# Altium PCB CH552DAPLINK.PcbDoc
Units mil, origin at the board's own origin, x right, y up, seen from the top; angles counter-clockwise.
Board outline 861 x 530 mil, 2 copper layers (Top Layer, Bottom Layer); 25 components, 30 nets, 102 pads, 19 vias.
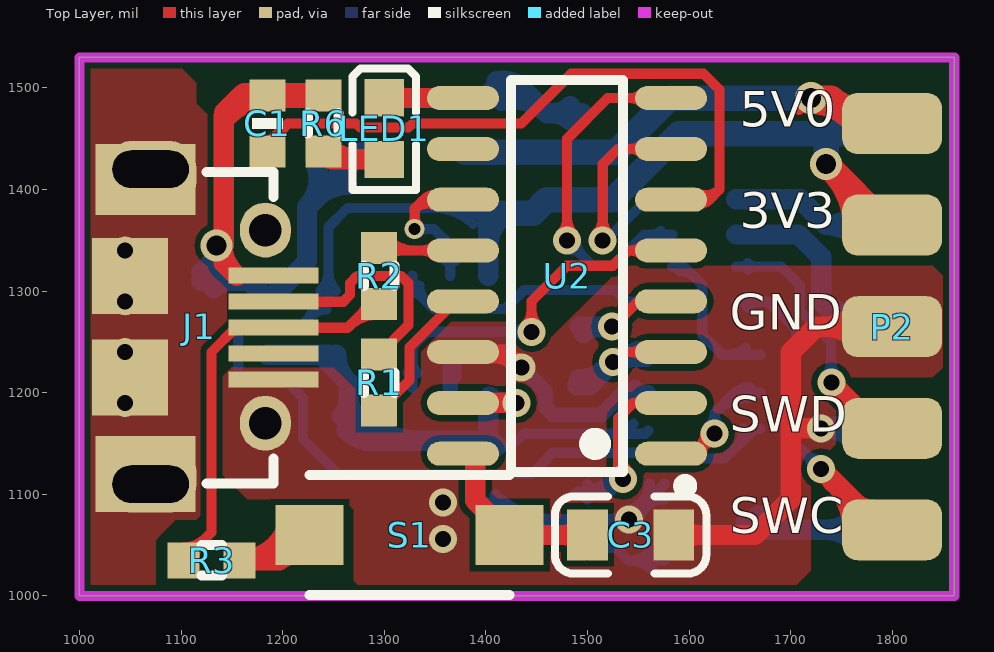
[diagram p0: Top Layer view]
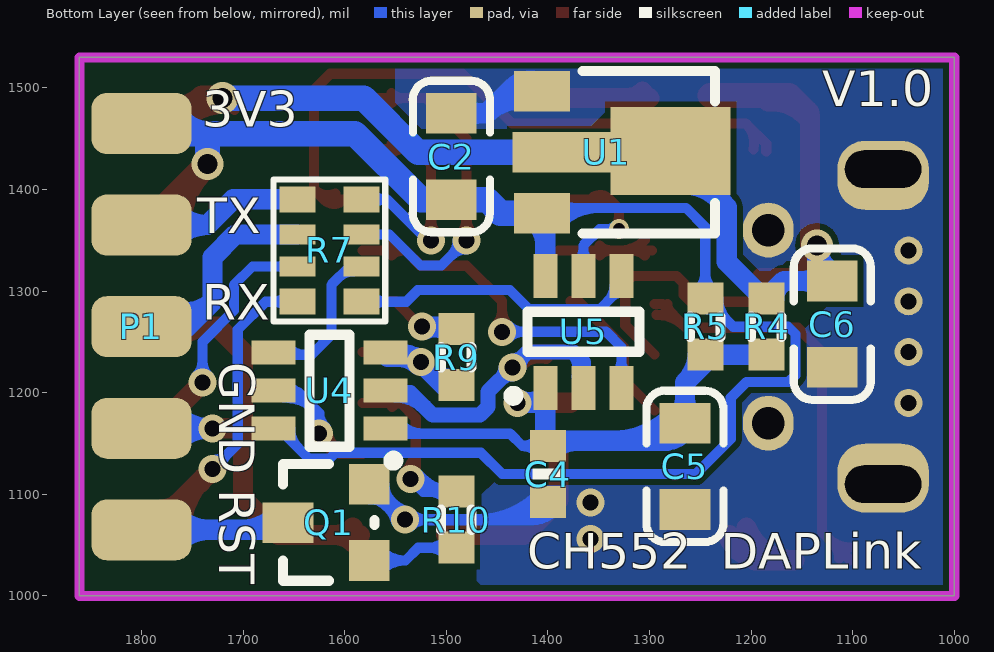
[diagram p1: Bottom Layer view, seen from below]
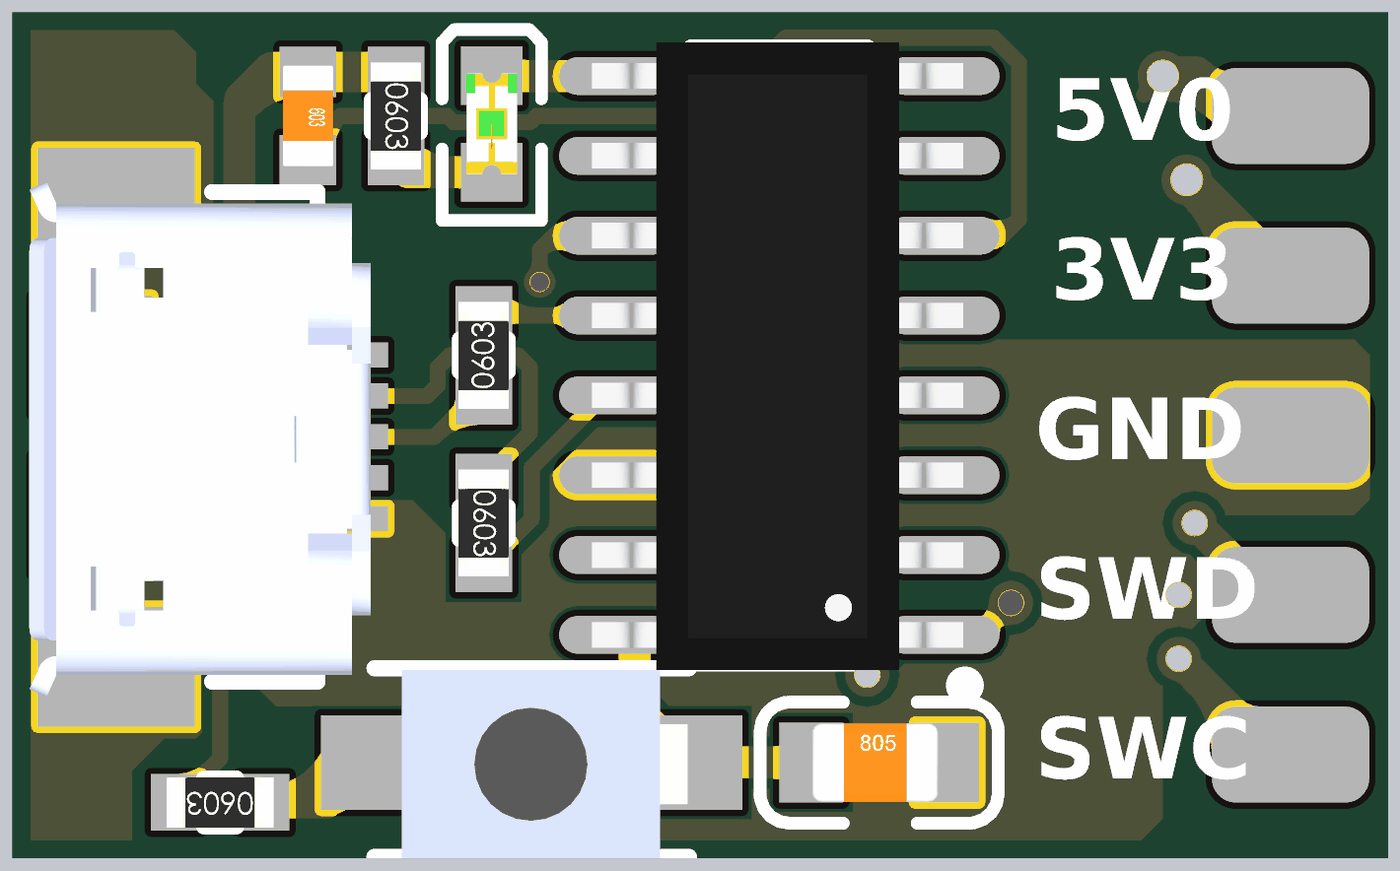
[diagram p2: 3D render of the assembled board from above, using the file's embedded part models]
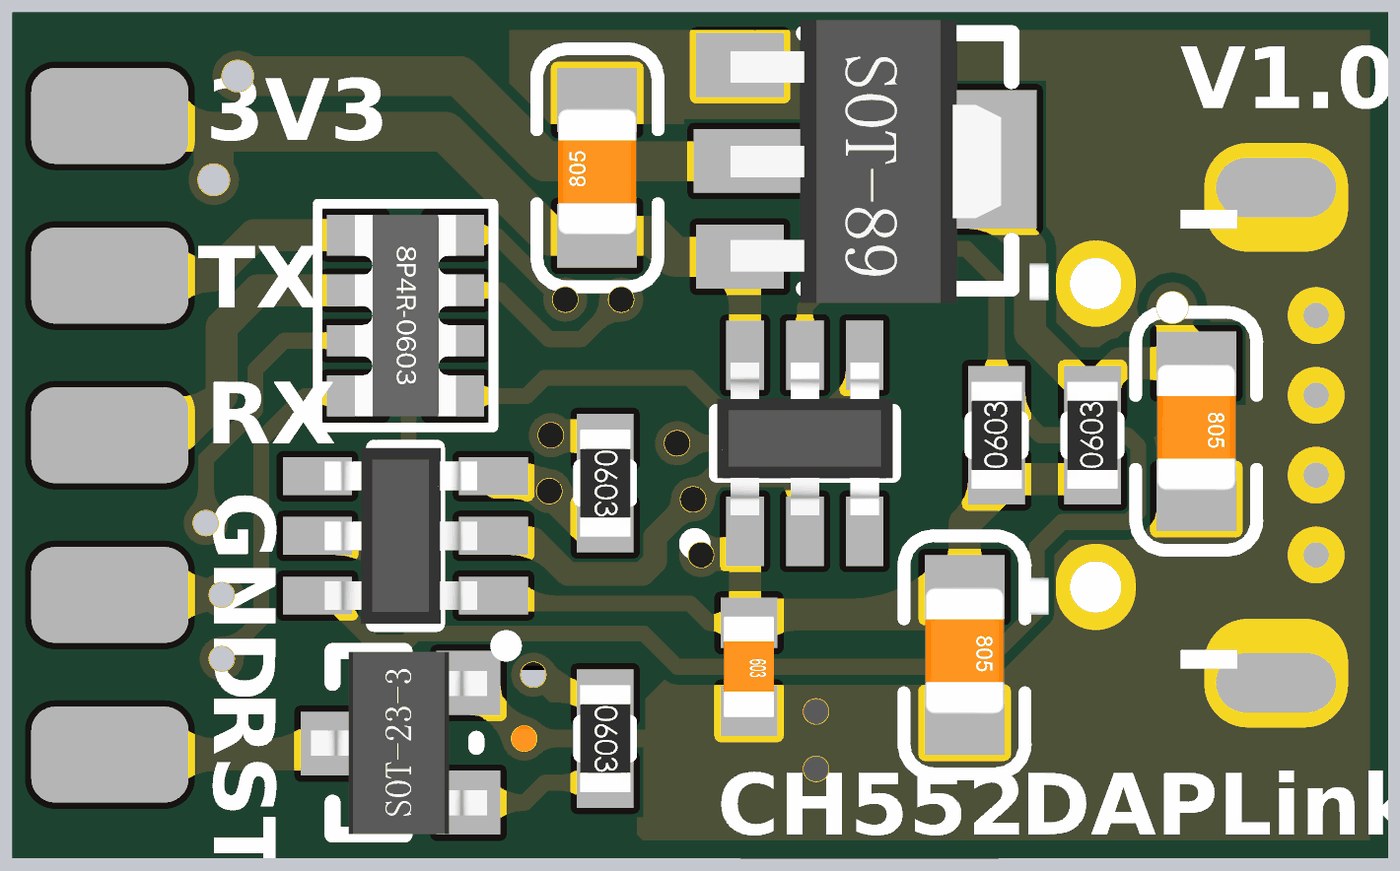
[diagram p3: 3D render of the assembled board from below, using the file's embedded part models]

## Layer stack, top to bottom
Top Solder: solder mask 0.4, Solder Resist, Dk 3.5
Top Layer: signal copper 1.4
Dielectric 1: dielectric 12.6, FR-4, Dk 4.8
Bottom Layer: signal copper 1.4
Bottom Solder: solder mask 0.4, Solder Resist, Dk 3.5

## Board outline
1000,1000 1861,1000 1861,1530 1000,1530

## Design rules (kind name [scope] priority, off if disabled: settings)
Clearance [All] p1: gap=6
DiffPairsRouting [All] p1: maxlimit=30 minlimit=6 mostfreqgap=6 toplayer_minwidth=6 toplayer_maxwidth=20 toplayer_prefwidth=9 bottomlayer_minwidth=6 bottomlayer_maxwidth=20 bottomlayer_prefwidth=9 maxuncoupledlength=500
HoleSize [All] p1: absolutevalues=TRUE maxlimit=10000 minlimit=12 maxpercent=80.000 minpercent=20.000
HoleToHoleClearance [All] p1: gap=0 allowstackedmicrovias=TRUE
MinimumSolderMaskSliver [All] p1: minsoldermaskwidth=0
PolygonConnect [All] p1: connectstyle=Direct reliefconductorwidth=10 reliefentries=4 polygonreliefangle="90 Angle" airgapwidth=10
RoutingVias [All] p1: holewidth=15.75 width=27.56 viastyle="Through Hole" minholewidth=11.81 minwidth=18 maxholewidth=3937.01 maxwidth=3937.01
SilkToSilkClearance [All] p1: silktosilkclearance=0
SilkToSolderMaskClearance [IsPad] p1: minsilkscreentomaskgap=0 clearancetoexposedcopper=TRUE
SolderMaskExpansion [All] p1: expansion=4
Width [All] p1: maxlimit=1000 minlimit=6 preferedwidth=10
23 further rules are at their usual default settings.

## Components (designator, comment, footprint, x,y, rotation, side; value= is the part's Value field where it differs from the comment)
C1 "Cap" MY0603_c 1185,1465 r270 top
C2 "Cap" MY0805_C 1495,1430 r90 bottom
C3 "Cap" MY0805_C 1540,1060 r0 top
C4 "Cap" MY0603_c 1400,1120 r270 bottom
C5 "Cap" MY0805_C 1265,1130 r270 bottom
C6 "Cap" MY0805_C 1120,1270 r270 bottom
J1 "USB_M" USB_micro_常用 1120,1270 r90 top locked
LED1 "LED-SMD" MY-0603_LED_B 1300,1460 r270 top
P1 "Header 5" header5 1800,1265 r90 bottom locked
P2 "Header 5" header5 1800,1265 r90 top locked
Q1 "NPN" MY_SOT23_BJT 1610,1075 r180 bottom
R1 "Res2" my0603_R 1295,1210 r270 top
R2 "Res2" my0603_R 1295,1315 r90 top
R3 "Res2" my0603_r 1130,1035 r180 top
R4 "Res2" my0603_r 1185,1265 r90 bottom
R5 "Res2" my0603_r 1245,1265 r90 bottom
R6 "Res2" my0603_r 1240,1465 r270 top
R7 "22ohm" RCA-8P4R-0603 1615,1340 r270 bottom
R9 "Res2" my0603_r 1490,1235 r270 bottom
R10 "Res2" my0603_r 1490,1075 r270 bottom
S1 "SW-PB" key_MICRO 1325,1060 r180 top
U1 "HT7533" MY_SOT-89-3 1380,1435 r0 bottom
U2 "CH552" MY-SOP-16_150mil 1480,1315 r90 top
U4 "sn74lvc1t45" MY-SOT-23-6 1615,1202 r180 bottom
U5 "sn74lvc1t45" MY-SOT-23-6 1365,1260 r270 bottom

## Footprints (in the part's own frame and the unit in brackets; to place one, negate y for a bottom-side part, rotate by r counter-clockwise, add the part's x,y. Pads: shape width x height; smd on the part's side, far side on the other; paste and mask are expansions set on the pad)
header5 [mil]
  rrect50% 60x98.43 smd: 1(200,0) 2(100,0) 3(0,0) 4(-100,0) 5(-200,0)
key_MICRO [mm]
  rect 1.7x1.5 smd: 1(-2.5,0) 2(2.5,0)
  silkscreen extent -2.5,-1.5 2.5,1.5, body extent -2.48,-1.47 2.48,1.53, height 2
MY0603_c [mm]
  rect 0.8x0.9 smd: 1(-0.7,0) 2(0.7,0)
  silkscreen extent -0.13,-0.38 0.13,0.38, body extent -0.8,-0.4 0.8,0.4, height 0.3
my0603_R [mm]
  rect 0.8x0.9 smd: 1(-0.7,0) 2(0.7,0)
  silkscreen extent -0.25,-0.38 0.25,0.38, body extent -0.85,-0.4 0.85,0.4, height 0.56
my0603_r [mm]
  rect 0.8x0.9 smd: 1(-0.7,0) 2(0.7,0)
  silkscreen extent -0.25,-0.38 0.25,0.38, body extent -0.85,-0.4 0.85,0.4, height 0.56
MY0805_C [mil]
  rect 40x50 smd: 1(-40,0) 2(45,0)
  silkscreen extent -72,-38 77,38, body extent -39,-25 39,25, height 30
MY-0603_LED_B [mm]
  rect 0.93x0.98 smd: A(0.77,0) K(-0.77,0)
  silkscreen extent -1.5,-0.79 1.54,0.79, body extent -0.8,-0.4 0.8,0.4, height 0.61
MY-SOP-16_150mil [mm]
  oval 0.6x1.8 smd: 1(-4.445,-2.6) 2(-3.175,-2.6) 3(-1.905,-2.6) 4(-0.635,-2.6) 5(0.635,-2.6) 6(1.905,-2.6) 7(3.175,-2.6) 8(4.445,-2.6) 9(4.445,2.6) 10(3.175,2.6) 11(1.905,2.6) 12(0.635,2.6) 13(-0.635,2.6) 14(-1.905,2.6) 15(-3.175,2.6) 16(-4.445,2.6)
  silkscreen extent -5.4,-3.1 4.9,1.4, body extent -5,-2.93 4.98,2.98, height 1.45
MY-SOT-23-6 [mm]
  rect 1.1x0.6 smd: 1(1.4,-0.95) 2(1.4,0) 3(1.4,0.95) 4(-1.4,0.95) 5(-1.4,0) 6(-1.4,-0.95)
  silkscreen extent -0.5,-1.87 1.72,1.4, body extent -1.28,-1.4 1.14,1.4, height 1.08
MY_SOT23_BJT [mil]
  rect 40x40 smd: 1(34.37,-40.12) 2(34.37,34.88)
  rect 50x40 smd: 3(-45.63,-3.12)
  silkscreen extent -51,-60 39,55, body extent -64,-60 46,54, height 47
MY_SOT-89-3 [mil]
  rect 55x40 smd: 1(25.57,-61.82) 3(25.57,58.18)
  rect 118.11x86.61 smd: 2(-100.98,-2.76)
  rect 110.24x40 smd: 2(-0.59,-1.82)
  silkscreen extent -144,-82 -14,78, body extent -138,-90 31,87, height 59
RCA-8P4R-0603 [mm] "3.2mm*1.6mm*0.6mm(长*宽*厚)"
  rect 0.65x0.9 smd: 1(-1.28,-0.8) 4(1.28,-0.8) 5(1.28,0.8) 8(-1.28,0.8)
  rect 0.5x0.9 smd: 2(-0.4,-0.8) 3(0.4,-0.8) 6(0.4,0.8) 7(-0.4,0.8)
  silkscreen extent -1.78,-1.4 1.78,1.4, body extent -1.6,-0.8 1.6,0.8, height 0.6
USB_micro_常用 [mm]
  rect 0.4x2.25 smd: 1(1.148,-1.8) 2(0.498,-1.8) 3(-0.152,-1.8) 4(-1.452,-1.8) 5(-0.802,-1.8)
  rrect80% 1.727x2.286 hole 0.94 slot 1.905 at 90 deg copper offset 0.152,0 mask+0: 4(-4.064,1.27)
  rect 1.905x2.5 smd: 4(-3.81,1.397)
  oval 1.372x1.27 hole 0.813 mask+0: 4(-2.54,-1.6) 4(2.286,-1.6)
  round 0.7 hole 0.4: 4(-2.032,1.905) 4(-0.762,1.905) 4(0.508,1.905) 4(1.778,1.905)
  rect 1.9x1.9 smd: 4(-1.397,1.778) 4(1.143,1.778)
  rect 1.778x2.5 smd: 4(3.556,1.397)
  rrect80% 1.727x2.286 hole 0.94 slot 1.905 at 90 deg copper offset -0.152,0 mask+0: 4(3.81,1.27)
  silkscreen extent -4.05,-1.8 3.74,-0.13, body extent -4.29,-2.65 3.91,2.78, height 2.75

## Part data
C1 C2 C3 C4 C5 C6: "Capacitor"
LED1: "贴片LED"
P1 P2: "Header, 5-Pin"
Q1: library part NPN_SOT23, "NPN Bipolar Transistor"
R1 R2 R3 R4 R5 R6 R9 R10: "Resistor"
R7: library part R-8P4R, "贴片网络排阻"
S1: "Switch"
U4 U5: library part TMP122

## Via types
v1: diameter 27.56, hole 15.75, Top Layer to Bottom Layer, tented both sides, 15 vias
v2: diameter 31.5, hole 19.68, Top Layer to Bottom Layer, tented both sides, 3 vias
v3: diameter 19.68, hole 11.81, Top Layer to Bottom Layer, tented both sides, 1 vias

## Nets (pads, with @x,y where several pads share a name; then routed paths per layer and width w, separated by ;. In a path a pad name is that pad's centre, name@x,y a point inside that pad or via, vN(x,y) a via of type N, cw(c..) or ccw(c..) an arc to the next point about the centre after c; other vN are vias at no path point)
GND: C2.2 C3.2 C4.2 C5.2 C6.2 J1.4 P1.4 P2.3 Q1.2 U1.1 U2.14 U4.2 U5.2 | length 1991.3
  Top Layer w15: U2.14 1419.84,1240 v1(1435,1224.84) ccw(c1407.65,1197.5) U2.14@1401.9,1235.74 ; v1@1428.72,1224.84 ccw(c1413.56,1224.84) 1424.28,1235.56 ccw(c1435,1246.28) v1@1435,1231.12 ; v1@1428.93,1223.21 ccw(c1414.29,1219.29) 1421.87,1232.42 ccw(c1429.45,1245.55) v1@1433.37,1230.91
  Top Layer w20: C3.2 1665,1060 1700,1095 1700,1240 1725,1265 P2.3 ; C3.2@1592.07,1052.93 cw(c1609.14,1035.86) 1609.14,1060 cw(c1609.14,1084.14) C3.2@1592.07,1067.07 ; 1702.5,1165 v1(1730,1165) ; P2.3@1766.65,1250.86 ccw(c1732.5,1216.72) 1732.5,1265 ccw(c1732.5,1313.28) P2.3@1766.65,1279.14
  Bottom Layer w11: C4.2@1393.66,1084.13 ccw(c1415.7,1106.18) 1415.7,1075 ; C4.2 1417.44,1075 ; C4.2@1401.44,1091.91 ccw(c1442.26,1132.73) 1442.26,1075 ; C4.2@1401.97,1082.19 cw(c1401.97,1062.2) 1416.1,1076.34 ; C4.2@1409.21,1099.69 ccw(c1468.82,1159.29) 1468.82,1075 ; C4.2@1412.11,1090.99 ccw(c1430.76,1088.32) 1417.44,1075 ; v1@1534.89,1069.15 ccw(c1520.76,1055.01) 1520.76,1075 ccw(c1520.76,1094.99) v1@1534.89,1080.85 ; v1@1538.61,1083 ccw(c1530.16,1114.53) Q1.2@1558.43,1098.21 ; v1@1540.75,1083.28 ccw(c1540.75,1103.27) 1554.88,1089.13 ccw(c1569.02,1075) v1@1549.03,1075 ; v1@1548.75,1072.86 cw(c1580.28,1064.41) Q1.2@1563.96,1092.68 ; Q1.2@1561.13,1109.88 cw(c1526.12,1109.88) 1550.88,1085.13 cw(c1575.63,1060.38) Q1.2@1575.63,1095.38 ; Q1.2 v1(1540.75,1075) 1417.44,1075
  Bottom Layer w15: U5.2 1365,1230 1375.04,1240.04 ; U5.2@1369.12,1216.01 cw(c1391.94,1223.13) 1375.03,1240.03 ; v1@1428.72,1224.84 ccw(c1413.56,1224.84) 1424.28,1235.56 ccw(c1435,1246.28) v1@1435,1231.12 ; v1@1435,1218.56 cw(c1435,1203.4) 1445.72,1214.12 cw(c1456.44,1224.84) v1@1441.28,1224.84 ; 1520.62,1185.5 cw(c1550.04,1156.08) U4.2@1550.04,1197.69 ; U4.2@1546.95,1205 cw(c1535.12,1216.49) 1535.12,1200 ; U4.2@1559.88,1200 1535.12,1200 ; 1375.04,1240.04 1419.8,1240.04 v1(1435,1224.84) 1458.78,1201.06 1458.78,1186.1 1466.69,1178.19 1513.31,1178.19 1535.12,1200
  Bottom Layer w20: U1.1 1438.18,1496.82 1460,1475 ; U1.1@1410.58,1506.5 cw(c1417.01,1481.55) 1435.23,1499.77 ; U1.1@1415.57,1487.13 cw(c1427.16,1442.16) 1460,1475 ; U1.1@1420.15,1489.75 cw(c1437.22,1472.68) 1437.22,1496.82 cw(c1437.22,1520.96) U1.1@1420.15,1503.89 ; C2.2@1482.93,1467.93 ccw(c1465.86,1450.86) 1465.86,1475 ccw(c1465.86,1499.14) C2.2@1482.93,1482.07 ; C2.2 1460,1475 ; v1(1730,1165) P1.4 ; P1.4@1766.65,1150.86 ccw(c1732.5,1116.72) 1732.5,1165 ccw(c1732.5,1213.28) P1.4@1766.65,1179.14
  other v1: 1358,1056 1358,1092
NetLED1_A: LED1.A R6.2 | length 126.4
  Top Layer w20: R6.2 1247.76,1429.68 LED1.A ; R6.2@1246.03,1441.51 ccw(c1274.57,1470.04) 1274.57,1429.68 ; LED1.A@1293.14,1423.81 ccw(c1278.96,1409.63) 1278.96,1429.68 ccw(c1278.96,1449.74) LED1.A@1293.14,1435.56
NetQ1_1: Q1.1 R10.2 | length 186.8
  Bottom Layer w10: R10.2 1527.56,1047.44 1540.12,1034.88 ; R10.2@1499.57,1039.84 cw(c1517.92,1021.49) 1517.92,1047.44 cw(c1517.92,1073.39) R10.2@1499.57,1055.04 ; Q1.1@1564.88,1024.42 ccw(c1540.12,1000.35) 1540.12,1034.88 ; Q1.1@1564.88,1045.34 cw(c1540.12,1069.41) 1540.12,1034.88 ; Q1.1 1540.12,1034.88
NetR3_1: R3.1 S1.2 | length 181.4
  Top Layer w20: 1186.79,1035 ccw(c1186.79,1073.93) S1.2@1223.08,1059.83 ; S1.2@1204.44,1067.07 cw(c1157.56,1085.29) R3.1 1196.57,1035 S1.2@1221.57,1060
P11: LED1.K U2.9 | length 120.7
  Top Layer w20: LED1.K@1300.31,1490 U2.9@1389.53,1490 ; LED1.K@1306.86,1484.44 cw(c1320.28,1471.02) 1320.28,1490 ; LED1.K@1306.86,1496.19 ccw(c1321.8,1511.13) 1321.8,1490
P14: R10.1 U2.2 | length 330.7
  Top Layer w10: v1@1530,1115 1530,1175 1545,1190 ; 1530,1148.27 ccw(c1568.27,1148.27) v1@1541.21,1121.21 ; U2.2@1553.32,1185.88 ccw(c1545,1179.55) 1545,1190 ; U2.2@1553.32,1194.12 cw(c1545,1200.45) 1545,1190 ; U2.2 1545,1190
  Bottom Layer w10: R10.1@1499.57,1094.96 cw(c1517.92,1076.61) 1517.92,1102.56 cw(c1517.92,1128.51) R10.1@1499.57,1110.16 ; 1511.21,1102.56 ccw(c1511.21,1134.62) v1@1535.94,1114.22 ; v1@1528.23,1120.58 cw(c1490,1152.1) R10.1 1522.56,1102.56 v1(1535,1115)
P15: R9.2 U2.3 U4.3 | length 304.4
  Top Layer w10: v1(1525,1230) 1535,1240 ; v1@1527.81,1238.32 ccw(c1530.05,1244.95) 1535,1240 ; v1@1533.32,1232.81 cw(c1539.95,1235.05) 1535,1240 ; U2.3@1553.92,1235.18 ccw(c1542.3,1223.56) 1542.3,1240 ccw(c1542.3,1256.44) U2.3@1553.92,1244.82 ; U2.3 1535,1240
  Bottom Layer w20: R9.2 1502.44,1207.44 v1(1525,1230) ; R9.2@1491.97,1213.19 ccw(c1491.97,1252.35) v1@1519.66,1224.66 ; 1513.99,1221.38 ccw(c1506.09,1235.07) v1@1521.35,1230.98 ; v1@1527.67,1227.33 cw(c1546.73,1208.27) U4.3@1546.73,1235.22 ; v1@1528.27,1228.11 cw(c1542.99,1219.61) U4.3@1538.59,1236.03 ; v1@1535.57,1235.22 ccw(c1535.57,1253.87) U4.3@1548.76,1240.68 ; U4.3@1549.7,1237.62 ccw(c1544.56,1210.44) v1(1525,1230) ; U4.3@1559.88,1237.4 1557.7,1235.22 1530.22,1235.22 v1(1525,1230)
P16: R9.1 U2.4 | length 133.4
  Top Layer w10: v1@1525,1265 1550,1290 U2.4
  Bottom Layer w20: R9.1@1492.44,1265 v1@1525,1265 ; R9.1@1496.03,1258.49 cw(c1511.74,1242.79) v1@1511.74,1265 ; R9.1@1506.96,1263.72 cw(c1512.13,1244.44) v1@1522.11,1261.73
  other v1: 1524,1265
P17: U2.5 U5.3 | length 477.1
  Top Layer w10: v1@1438.79,1266.21 ccw(c1423.8,1281.2) 1445,1281.2 ccw(c1466.2,1281.2) v1@1451.21,1266.21 ; v1(1445,1260) 1445,1290 1479.96,1324.96 1525,1324.96 1540.04,1340 U2.5 ; U2.5@1553.92,1335.18 ccw(c1542.3,1323.56) 1542.3,1340 ccw(c1542.3,1356.44) U2.5@1553.92,1344.82
  Bottom Layer w10: U5.3@1322.78,1219.54 ccw(c1311.16,1231.17) 1327.6,1231.17 ccw(c1344.04,1231.17) U5.3@1332.41,1219.54 ; U5.3 1327.6,1245 1342.6,1260 v1@1440,1260 ; v1@1438.79,1253.79 ccw(c1423.8,1238.8) 1423.8,1260 ccw(c1423.8,1281.2) v1@1438.79,1266.21 ; v1@1445,1255 v1@1440,1260 ; v1(1445,1260) v1@1440,1260
P30: R7.7 U2.8 | length 456.2
  Top Layer w10: v1@1473.79,1356.21 ccw(c1458.8,1371.2) 1480,1371.2 ccw(c1501.2,1371.2) v1@1486.21,1356.21 ; v1(1480,1350) 1480,1450 1520,1490 U2.8 ; U2.8@1553.92,1485.18 ccw(c1542.3,1473.56) 1542.3,1490 ccw(c1542.3,1506.44) U2.8@1553.92,1494.82
  Bottom Layer w10: v1@1480,1341.22 cw(c1480,1320.13) 1494.91,1335.04 ; v1(1480,1350) 1504.74,1325.22 1525.26,1325.22 1555.79,1355.75 R7.7 ; v1@1488.78,1350 ccw(c1510.08,1350) 1495.02,1334.94 ; R7.7@1572.21,1352.32 ccw(c1563.94,1344.06) 1563.94,1355.75 ccw(c1563.94,1367.44) R7.7@1572.21,1359.17
P31: R7.8 U2.7 | length 330.1
  Top Layer w10: v1@1508.79,1356.21 ccw(c1493.8,1371.2) 1515,1371.2 ccw(c1536.2,1371.2) v1@1521.21,1356.21 ; v1(1515,1350) 1515,1425 1530,1440 U2.7 ; U2.7@1553.92,1435.18 ccw(c1542.3,1423.56) 1542.3,1440 ccw(c1542.3,1456.44) U2.7@1553.92,1444.82
  Bottom Layer w10: v1@1520.39,1355.39 v1(1515,1350) 1518.24,1350 1558.63,1390.39 R7.8 ; R7.8@1573.07,1384.88 ccw(c1559.76,1371.57) 1559.76,1390.39 ccw(c1559.76,1409.21) R7.8@1573.07,1395.91
P32: U2.1 U4.5 | length 299.3
  Top Layer w10: U2.1 1605,1140 v1(1625,1160) ; U2.1@1605.98,1146.81 ccw(c1605.98,1160.88) v1@1615.93,1150.93 ; U2.1@1607.97,1146.33 ccw(c1599.7,1160.64) v1@1616.22,1160.22 ; U2.1@1612.8,1140 cw(c1631.61,1140) v1@1618.31,1153.31 ; v1@1616.22,1160 cw(c1595.02,1160) 1610.01,1145.01 cw(c1625,1130.02) v1@1625,1151.22
  Bottom Layer w10: v1@1619.06,1166.46 ccw(c1606.61,1180) 1625,1180 ; v1(1625,1160) 1625,1180 ; 1625.99,1180.99 cw(c1660.28,1146.7) U4.5@1660.28,1195.19 ; v1@1630.94,1166.46 cw(c1643.39,1180) 1625,1180 ; 1643.06,1198.06 cw(c1660.28,1180.84) U4.5@1660.28,1205.19 ; U4.5@1654.38,1205.41 cw(c1645,1210.84) 1645,1200 ; U4.5@1670.12,1200 1645,1200 ; 1625,1180 1645,1200
P33: U2.10
P34: U2.11 U5.5 | length 290.1
  Top Layer w10: v3@1326.58,1364.42 ccw(c1318.31,1372.69) 1330,1372.69 ccw(c1341.69,1372.69) v3@1333.42,1364.42 ; v3(1330,1361) 1330,1381 ; 1339.47,1390.47 cw(c1349.07,1380.88) U2.11@1355.54,1392.8 ; U2.11@1348.89,1385.51 ccw(c1339,1376.86) 1339,1390 ; U2.11@1348.89,1394.49 cw(c1339,1403.14) 1339,1390 ; U2.11@1350.77,1384.01 ccw(c1342.4,1368.6) 1330,1381 ; U2.11@1400,1390 U2.11 1339,1390 ; 1330,1381 1339,1390
  Bottom Layer w10: v3(1330,1361) 1349,1361 1365,1345 U5.5 ; v3@1333.42,1357.58 cw(c1341.69,1349.31) 1341.69,1361 cw(c1341.69,1372.69) v3@1333.42,1364.42 ; U5.5@1360.18,1329.78 ccw(c1348.56,1341.4) 1365,1341.4 ccw(c1381.44,1341.4) U5.5@1369.82,1329.78
P36: R2.2 U2.12 | length 158.6
  Top Layer w10: R2.2@1297.56,1340 U2.12@1389.53,1340 ; R2.2@1304.57,1334.96 cw(c1316.74,1322.79) 1316.74,1340 ; R2.2@1304.57,1350.16 ccw(c1329.09,1374.69) 1329.09,1340 ; U2.12@1349.2,1335.18 ccw(c1337.57,1323.56) 1337.57,1340 ccw(c1337.57,1356.44) U2.12@1349.2,1344.82
P37: R1.2 U2.13 | length 146.2
  Top Layer w10: R1.2 1325,1212.44 1325,1244.93 1370.07,1290 U2.13
RST: C1.2 U2.6 | length 727.8
  Top Layer w10: C1.2 1185,1445 1205,1465 ; C1.2@1197.48,1439.67 cw(c1224.59,1445.41) 1205,1465 ; U2.6 1620,1390 ; U2.6@1604.66,1387.1 ccw(c1610.28,1399.38) 1619.83,1389.83 ; U2.6@1608.82,1396.19 ccw(c1616.67,1413.33) 1630,1400 ; U2.6@1611.34,1385.79 cw(c1620,1378.99) 1620,1390 ; U2.6@1611.34,1394.21 ccw(c1620,1401.01) 1620,1390 ; 1205,1465 1272.16,1465 1276.15,1461.01 1323.85,1461.01 1327.84,1465 1435,1465 1484,1514 1614.24,1514 1630,1498.24 1630,1400 ; 1620,1390 1630,1400
RST_T: P1.5 Q1.3 | length 260.5
  Bottom Layer w20: Q1.3 1662.51,1065 P1.5 ; Q1.3@1667.7,1078.95 ccw(c1701.39,1112.64) 1701.39,1065 ; P1.5@1766.65,1050.86 ccw(c1732.5,1016.72) 1732.5,1065 ccw(c1732.5,1113.28) P1.5@1766.65,1079.14
RXD: P1.3 R7.2 | length 295.4
  Bottom Layer w20: R7.2 1707.48,1355.75 1730,1333.23 1730,1290 ; 1749.82,1270.18 ccw(c1768.93,1289.29) P1.3@1780.79,1265 ; P1.3@1772.02,1282.97 cw(c1755.93,1315.93) 1730,1290 ; P1.3 1755,1265 1730,1290
SWCLK: P2.5 R7.4 | length 483.1
  Top Layer w20: v1@1729.02,1121.35 cw(c1723.38,1100.31) 1742.25,1111.2 ; v1@1729.36,1121.28 cw(c1726.47,1104.51) 1741.2,1113.02 ; v1(1730,1125) 1790,1065 P2.5 ; 1740.13,1114.87 cw(c1690.26,1065) P2.5@1760.79,1065 ; P2.5@1762.37,1092.63 ccw(c1780.79,1111.04) P2.5@1780.79,1085
  Bottom Layer w10: R7.4 1677.77,1289.61 1705.22,1262.15 1705.22,1149.78 v1(1730,1125) ; R7.4@1656.93,1284.09 cw(c1670.24,1270.79) 1670.24,1289.61 cw(c1670.24,1308.43) R7.4@1656.93,1295.12 ; v1@1721.22,1125 ccw(c1700.02,1125) 1715.01,1139.99 ccw(c1730,1154.98) v1@1730,1133.78
SWDIO: P2.4 R7.3 | length 309.2
  Top Layer w20: v1(1740,1210) 1785,1165 P2.4
  Bottom Layer w10: R7.3 1690.75,1324.25 1709,1306 1709,1281 1739.79,1250.21 1739.79,1210.21 v1(1740,1210) ; R7.3@1657.79,1320.83 cw(c1666.06,1312.56) 1666.06,1324.25 cw(c1666.06,1335.94) R7.3@1657.79,1327.68 ; v1@1733.79,1216.21 ccw(c1719.32,1230.68) 1739.79,1230.68 ; 1739.79,1231.71 ccw(c1761.71,1231.71) v1@1746.21,1216.21
TSWC: R7.5 U5.4 | length 344
  Bottom Layer w10: U5.4@1327.6,1298.46 cw(c1327.6,1286.31) U5.4@1336.19,1294.9 ; U5.4 1327.6,1303.5 1348.63,1282.46 1418.77,1282.46 1437.3,1301 1528,1301 1539.39,1289.61 R7.5 ; U5.4@1334.41,1305.28 ccw(c1355.14,1305.28) 1340.48,1290.62 ; R7.5@1573.07,1284.09 ccw(c1559.76,1270.79) 1559.76,1289.61 ccw(c1559.76,1308.43) R7.5@1573.07,1295.12
TSWD: R7.6 U4.4 | length 185.6
  Bottom Layer w10: R7.6 1594.93,1324.25 1613,1306.18 1613,1257 1632.6,1237.4 U4.4@1670.12,1237.4 ; R7.6@1591.38,1319.41 cw(c1591.38,1299.15) 1605.7,1313.48 ; 1639,1237.4 ccw(c1639,1260.67) U4.4@1655.46,1244.22
TXD: P1.2 R7.1 | length 233.9
  Bottom Layer w20: R7.1 1709.61,1390.39 1735,1365 ; P1.2@1766.11,1351.41 ccw(c1735,1322.59) 1735,1365 ; P1.2@1766.11,1378.59 cw(c1735,1407.41) 1735,1365 ; P1.2 1735,1365
USB_DM: J1.2 R1.1 | length 235.2
  Top Layer w10: J1.2 1259.59,1289.59 1266.28,1296.28 1266.28,1307.75 1273.54,1315 1316.46,1315 1323.72,1307.75 1323.72,1266.28 R1.1
USB_DP: J1.3 R2.1 R3.2 | length 482.6
  Top Layer w10: R3.2 1130,1062.56 1130,1240 1154,1264 J1.3 1264,1264 1287.44,1287.44 R2.1 ; R3.2@1102.44,1047.72 ccw(c1102.44,1078.42) 1124.15,1056.71 ; R3.2@1113.19,1036.97 cw(c1134.38,1036.97) 1119.4,1051.96 ; 1265.14,1265.14 cw(c1293.03,1237.25) R2.1@1293.03,1276.69 ; R2.1@1278.64,1278.64 ccw(c1269.83,1287.44) R2.1@1282.28,1287.44
V33: C3.1 S1.1 U2.16 | length 208.5
  Top Layer w20: U2.16@1389.53,1140 1389.53,1093.9 S1.1 C3.1 ; C3.1@1492.93,1052.93 ccw(c1475.86,1035.86) 1475.86,1060 ccw(c1475.86,1084.14) C3.1@1492.93,1067.07
VCC: C1.1 C6.1 J1.1 P2.1 R4.2 R6.1 U1.2 | length 1384.7
  Top Layer w10: v2@1709.95,1486.18 cw(c1702.97,1483.53) 1708.25,1478.25 ; v2@1716.18,1479.95 ccw(c1713.53,1472.97) 1708.25,1478.25 ; v2(1720,1490) 1708.25,1478.25
  Top Layer w15: J1.1@1154.82,1315.18 J1.1
  Top Layer w20: v2@1140.75,1345 ccw(c1178.77,1345) J1.1@1151.88,1318.12 ; 1142,1328 J1.1@1154.82,1315.18 ; v2@1142,1345 1142,1472
  Top Layer w25: C1.1@1182.83,1489.32 ccw(c1179.79,1440.21) 1145,1475 1162.56,1492.56 C1.1 R6.1 ; v2@1720,1486.75 cw(c1720,1430.63) P2.1@1759.69,1470.31 ; v2(1720,1490) 1740,1490 ; P2.1@1775.3,1481.62 cw(c1764.45,1514.45) 1740,1490 ; P2.1 1765,1465 1740,1490
  Bottom Layer w20: C6.1@1119.92,1318.62 ccw(c1104.38,1345) v2(1135,1345) 1135,1320.12 C6.1@1124.88,1310 ; C6.1 C6.1@1124.88,1310 ; C6.1@1132.07,1302.93 cw(c1149.14,1285.86) 1149.14,1310 cw(c1149.14,1334.14) C6.1@1132.07,1317.07 ; R4.2@1171.83,1305.73 cw(c1158.65,1292.56) R4.2@1177.28,1292.56 ; U1.2@1232.47,1425.08 cw(c1196.48,1410.27) 1224,1382.75 ; 1233.29,1392.04 cw(c1263.27,1362.07) U1.2@1263.27,1404.46 ; U1.2@1279.02,1437.76 1224,1382.75 ; C6.1@1124.88,1310 1167.56,1310 R4.2 1187.56,1292.56 1224,1329 1224,1382.75
  Bottom Layer w25: U1.2@1379.41,1436.82 1379.73,1436.5 1527.66,1436.5 1581.16,1490 v2(1720,1490)
VCC_3.3: C2.1 P1.1 P2.2 R5.2 U1.3 U4.6 U5.6 | length 1902.3
  Top Layer w25: v2(1735,1425) 1795,1365 P2.2 ; v2@1740.86,1419.14 cw(c1686.73,1365) P2.2@1763.29,1365
  Bottom Layer w10: 1223.29,1270.85 ccw(c1201.58,1292.56) R5.2@1232.28,1292.56 ; 1228.04,1275.6 cw(c1243.03,1260.62) R5.2@1243.03,1281.81 ; R5.2@1237.4,1300.16 ccw(c1219.05,1318.51) 1245,1318.51 ccw(c1270.95,1318.51) R5.2@1252.6,1300.16 ; 1349.73,1381.84 cw(c1349.73,1328.47) U1.3@1387.47,1366.21 ; 1373.87,1381.84 cw(c1373.87,1352.62) U1.3@1394.54,1373.28 ; 1373.99,1381.84 ccw(c1373.99,1400.9) U1.3@1387.47,1387.42 ; U1.3 1400.55,1381.84 1263.84,1381.84 1245,1363 R5.2 1217.44,1265 1163.54,1265 1156.28,1257.75 1156.28,1217.14 1162.73,1210.69 1204.31,1210.69 1220,1195 1220,1154.44 1254.44,1120 1445,1120 1465.88,1140.88 1609.07,1140.88 1614.74,1135.22 1635.26,1135.22 1664.64,1164.6 U4.6 ; 1645.56,1145.52 ccw(c1626.48,1164.6) U4.6@1653.46,1164.6
  Bottom Layer w20: U5.6 U1.3@1402.4,1373.65 ; 1402.4,1345.02 cw(c1437.38,1345.02) U1.3@1412.65,1369.75
  Bottom Layer w25: U1.3 1446.82,1376.82 1460,1390 C2.1 1525,1390 1590,1455 1735,1455 ; v2(1735,1425) 1735,1455 ; P1.1@1765.34,1473.22 cw(c1735,1489.37) 1735,1455 ; P1.1 1790,1455 1735,1455
VMCU: C4.1 C5.1 R4.1 R5.1 U2.15 U4.1 U5.1 | length 834.7
  Top Layer w20: U2.15 v1(1430,1190)
  Bottom Layer w10: C4.1 1424.96,1147.56 ; C4.1@1410.22,1140.67 cw(c1424.96,1128.34) 1424.96,1147.56 ; C4.1@1410.22,1154.45 ccw(c1424.96,1166.78) 1424.96,1147.56 ; 1521.75,1159.69 ccw(c1521.75,1192.89) U4.1@1545.22,1169.41 ; U4.1@1559.88,1162.6 1556.98,1159.69 1437.09,1159.69 1424.96,1147.56
  Bottom Layer w20: R4.1 R5.1 1245,1230 1265,1210 C5.1 1282.4,1152.6 C4.1@1400,1152.6 ; R5.1@1252.72,1237.44 ccw(c1289.31,1237.44) 1263.43,1211.57 ; C5.1@1257.93,1177.07 ccw(c1240.86,1194.14) 1265,1194.14 ccw(c1289.14,1194.14) C5.1@1272.07,1177.07 ; C5.1@1262.93,1162.93 ccw(c1287.87,1187.87) C5.1@1287.87,1152.6 ; C5.1@1277.07,1177.07 ccw(c1336.15,1236.15) 1336.15,1152.6 ; 1371.99,1152.6 cw(c1371.99,1121.52) C4.1@1393.97,1143.49 ; C4.1@1402.4,1155.2 1402.4,1190 v1(1430,1190) ; U5.1@1403.68,1196.32 ccw(c1418.94,1211.58) v1@1418.94,1190 ; U5.1@1413.77,1191.39 ccw(c1418.66,1209.64) v1@1428.11,1193.27
pads on no net: J1.5

## Polygon pours and split planes (outlines as drawn)
GND on Top Layer "Top Layer-No Net" (solid, pour order 8): 1835,1325 1770,1325 1535,1325 1515,1305 1465,1255 1435,1255 1420,1270 1390,1270 1355,1270 1345,1260 1325,1240 1325,1212.44 1305,1192.44 1302.44,1195 1280,1195 1260,1215 1250,1225 1225,1225 1150,1225 1140,1215 1140,1125 1140,1120 1165,1095 1225,1095 1260,1095 1270,1085 1270,1055 1270,1015 1285,1000 1330,1000 1695,1000 1715,1020 1720,1025 1720,1080 1720,1125 1740,1145 1745,1150 1745,1175 1745,1215 1790,1215 1840,1215 1855,1230 1860,1235 1860,1290 1860,1305 1840,1325
GND on Top Layer "Top Layer-No Net" (solid, pour order 5): 1000,1530 1000,1000 1030,1000 1065,1000 1075,1010 1075,1025 1075,1055 1080,1060 1095,1075 1105,1075 1115,1075 1130,1090 1130,1170 1130,1240 1145,1255 1145,1285 1145,1455 1125,1475 1115,1485 1115,1495 1115,1505 1100,1520 1090,1530 1085,1530
GND on Bottom Layer "Top Layer-No Net" (solid, pour order 6): 1530,1530 1000,1530 1000,1000 1440,1000 1455,1000 1470,1015 1470,1050 1470,1070 1465,1075 1465,1100 1450,1115 1405,1115 1259.44,1115 1224.44,1150 1220,1154.44 1220,1195 1204.31,1210.69 1170,1210.69 1162.73,1210.69 1156.28,1217.14 1156.28,1250 1156.28,1253.72 1140,1270 1130,1280 1130,1310 1130,1280 1115,1295 1115,1300 1115,1340 1130,1355 1155,1330 1160,1330 1165,1330 1170,1325 1175,1320 1195,1320 1200,1320 1210,1330 1215,1335 1215,1415 1215,1475 1225,1485 1255,1485 1335,1485 1350,1470 1360,1460 1420,1460 1530,1460 1545,1475 1550,1480 1550,1505 1550,1520 1540,1530

## Keep-outs
Keep-Out Layer:
  the board outline again, w10

## Silkscreen, mask and mechanical layers (free items; w line width, h text height)
Top Overlay:
  text "5V0" at 1650,1450 h60
  text "3V3" at 1650,1350 h60
  text "GND" at 1640,1250 h60
  text "SWD" at 1640,1150 h60
  text "SWC" at 1640,1050 h60
Bottom Overlay:
  text "V1.0" at 1130,1470 h60
  text "3V3" at 1740,1450 h60
  text "TX" at 1745,1345 h60
  text "RX" at 1740,1260 h60
  text "GND" at 1735,1230 h60 r90
  text "RST" at 1735,1105 h60 r90
  text "DAPLink" at 1230,1015 h60
  text "CH552" at 1420,1015 h60